# EAGLE board PCBok v24 (EAGLE 9.7.0)
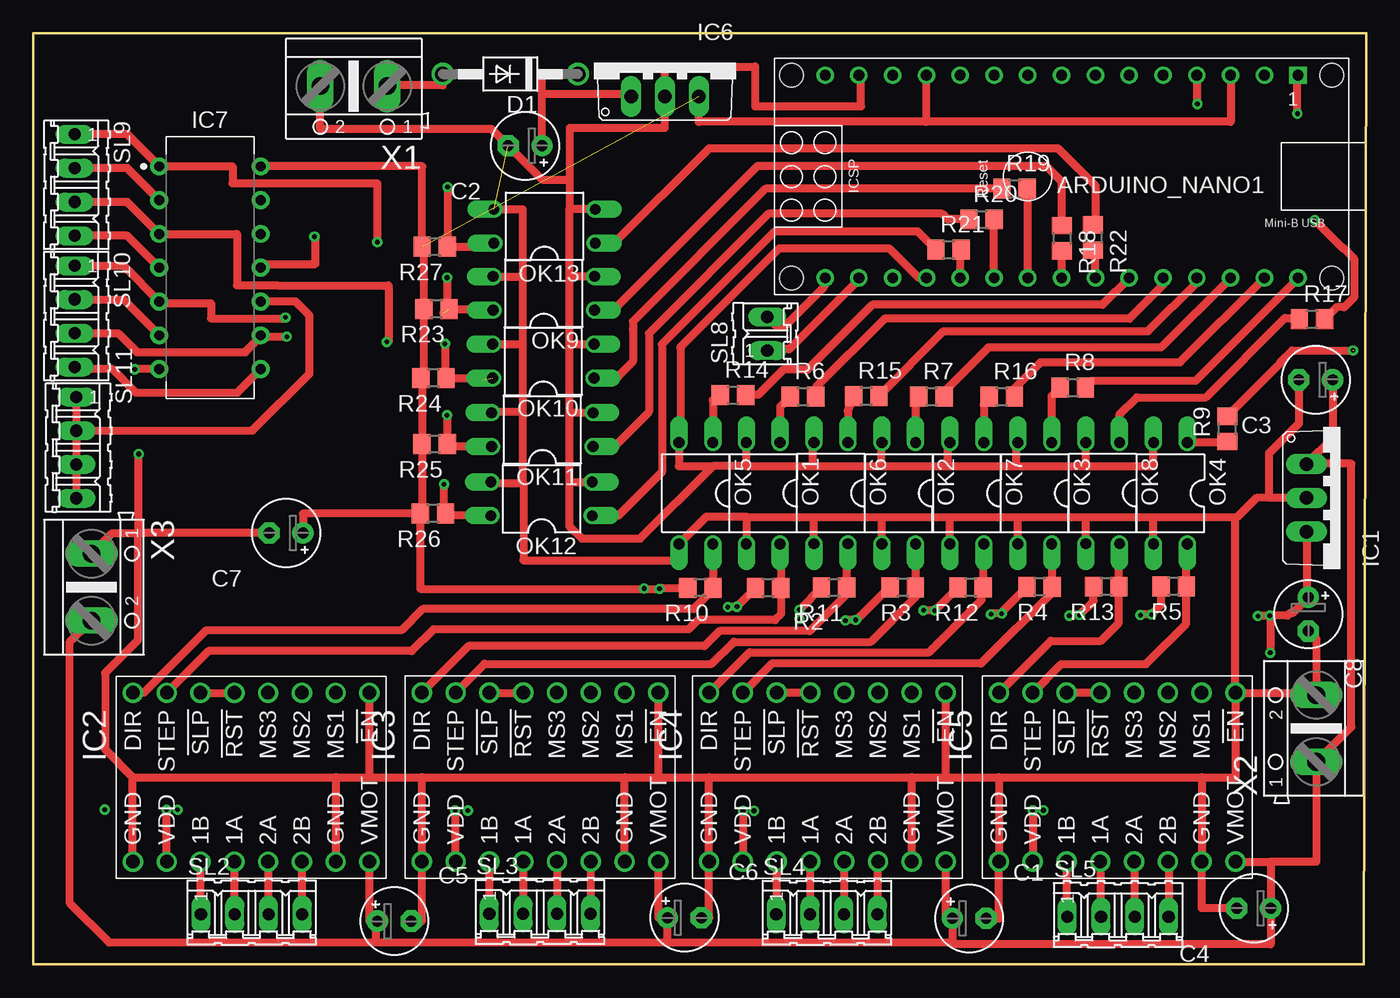
[diagram p0: board, top side]
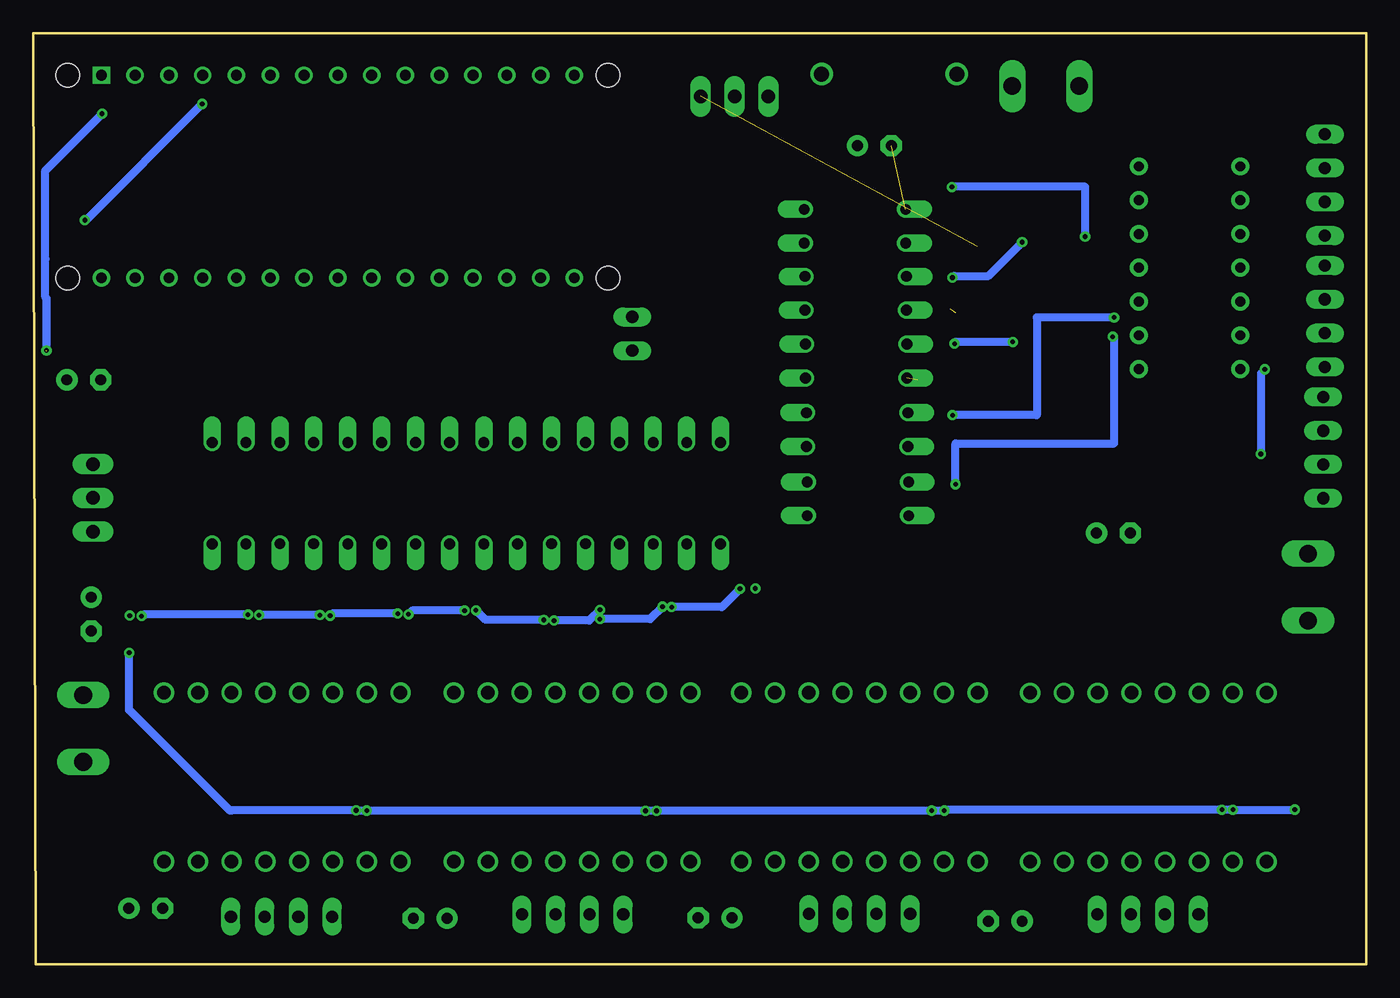
[diagram p1: board, bottom side, seen from below]

Size 100.2 x 70 mm. Coordinates in mm from the lower left corner, seen from the top.
Outline: 0,0 100,0 100.2,70 0,70 0,0
Copper layers (1*16): Top / Bottom
Stack-up Default Layer Stack: Top User Defined 0.035mm / Dielectric-1 User Defined 1.5mm / Bottom User Defined 0.035mm
Design rules "default": minimum track width 6mil, minimum drill 0.35mm, track to track 6mil, track to pad 6mil, pad to pad 6mil, via to via 6mil, smd to smd 6mil, copper to edge 40mil, drill to drill 6mil, minimum pad ring 10mil, minimum via ring 8mil, stop-mask expansion 4mil, vias tented up to drill 0mil, thermal gap 10mil

## Footprints (pad centres in the part's own frame; a part is rotated, then mirrored left to right if it is on the bottom)
ARDUINO_NANO = drill 0.8 square: 1 -20.32,-7.62 | drill 0.8: 2 -17.78,-7.62; 3 -15.24,-7.62; 4 -12.7,-7.62; 5 -10.16,-7.62; 6 -7.62,-7.62; 7 -5.08,-7.62; 8 -2.54,-7.62; 9 0,-7.62; 10 2.54,-7.62; 11 5.08,-7.62; 12 7.62,-7.62; 13 10.16,-7.62; 14 12.7,-7.62; 15 15.24,-7.62; 16 15.24,7.62; 17 12.7,7.62; 18 10.16,7.62; 19 7.62,7.62; 20 5.08,7.62; 21 2.54,7.62; 22 0,7.62; 23 -2.54,7.62; 24 -5.08,7.62; 25 -7.62,7.62; 26 -10.16,7.62; 27 -12.7,7.62; 28 -15.24,7.62; 29 -17.78,7.62; 30 -20.32,7.62 | hole 1.778: -22.86,-7.62; -22.86,7.62; 17.78,7.62; 17.78,-7.62
E2,5-5 = drill 0.813 pad 1.6: + -1.27,0 | drill 0.813 pad 1.6 octagon: - 1.27,0
DO41-10 = drill 1.118: A 5.08,0; C -5.08,0
TO220V = drill 1.016 long: 1 -2.54,-2.54; 2 0,-2.54; 3 2.54,-2.54
A4988 = drill 1.016: 1 -6.35,8.89; 2 -6.35,6.35; 3 -6.35,3.81; 4 -6.35,1.27; 5 -6.35,-1.27; 6 -6.35,-3.81; 7 -6.35,-6.35; 8 -6.35,-8.89; 9 6.35,-8.89; 10 6.35,-6.35; 11 6.35,-3.81; 12 6.35,-1.27; 13 6.35,1.27; 14 6.35,3.81; 15 6.35,6.35; 16 6.35,8.89
DIP762W53P254L1969H508Q14B = drill 0.743 pad 1.343: 1 -3.81,7.62; 2 -3.81,5.08; 3 -3.81,2.54; 4 -3.81,0; 5 -3.81,-2.54; 6 -3.81,-5.08; 7 -3.81,-7.62; 8 3.81,-7.62; 9 3.81,-5.08; 10 3.81,-2.54; 11 3.81,0; 12 3.81,2.54; 13 3.81,5.08; 14 3.81,7.62
DIL04 = drill 0.813 offset: 1 -1.27,-3.81; 2 1.27,-3.81; 3 1.27,3.81; 4 -1.27,3.81
R0805 = smd 1.3 x 1.5: 1 -0.95,0; 2 0.95,0
04P = drill 0.914 long: 1 -3.81,0; 2 -1.27,0; 3 1.27,0; 4 3.81,0
02P = drill 0.914 long: 1 -1.27,0; 2 1.27,0
AK500/2 = drill 1.321 long: 1 -2.515,0; 2 2.515,0

## Placement (x,y rotation side)
ARDUINO_NANO1  [ARDUINO_NANO]  74.77,59.23 180 top
C1  100u  [E2,5-5]  70.36,3.45 0 top
C2  100u  [E2,5-5]  36.97,61.54 180 top
C3  100u  [E2,5-5]  96.41,43.95 180 top
C4  100u  [E2,5-5]  91.75,4.22 180 top
C5  100u  [E2,5-5]  27.14,3.24 0 top
C6  100u  [E2,5-5]  48.95,3.5 0 top
C7  100u  [E2,5-5]  19.01,32.43 180 top
C8  100u  [E2,5-5]  95.85,26.33 270 top
D1  1N4004  [DO41-10]  35.86,66.93 180 top
IC1  7805TV  [TO220V]  98.26,35.06 270 top
IC2  2128-A4988  [A4988]  16.38,14.06 270 top
IC3  2128-A4988  [A4988]  38.1,14.07 270 top
IC4  2128-A4988  [A4988]  59.69,14.07 270 top
IC5  2128-A4988  [A4988]  81.48,14.07 270 top
IC6  7805TV  [TO220V]  47.49,67.8 0 top
IC7  74HC04_PDIP  [DIP762W53P254L1969H508Q14B]  13.29,52.37 0 top
OK1  PC817  [DIL04]  54.87,35.42 180 top
OK2  PC817  [DIL04]  65.06,35.42 180 top
OK3  PC817  [DIL04]  75.29,35.41 180 top
OK4  PC817  [DIL04]  85.48,35.41 180 top
OK5  PC817  [DIL04]  49.81,35.41 180 top
OK6  PC817  [DIL04]  59.96,35.43 180 top
OK7  PC817  [DIL04]  70.19,35.41 180 top
OK8  PC817  [DIL04]  80.39,35.43 180 top
OK9  PC817  [DIL04]  38.38,50.45 90 top
OK10  PC817  [DIL04]  38.33,45.35 90 top
OK11  PC817  [DIL04]  38.27,40.2 90 top
OK12  PC817  [DIL04]  38.21,35 90 top
OK13  PC817  [DIL04]  38.43,55.49 90 top
R2  100  [R0805]  55.25,28.3 180 top
R3  100  [R0805]  65.37,28.34 180 top
R4  100  [R0805]  75.65,28.38 180 top
R5  100  [R0805]  85.73,28.41 180 top
R6  100  [R0805]  57.86,42.69 0 top
R7  100  [R0805]  67.52,42.69 0 top
R8  100  [R0805]  78.14,43.37 0 top
R9  100  [R0805]  89.76,40.26 90 top
R10  100  [R0805]  50.15,28.31 180 top
R11  100  [R0805]  60.21,28.32 180 top
R12  100  [R0805]  70.46,28.34 180 top
R13  100  [R0805]  80.65,28.39 180 top
R14  100  [R0805]  52.6,42.8 0 top
R15  100  [R0805]  62.62,42.73 0 top
R16  100  [R0805]  72.81,42.68 0 top
R17  100  [R0805]  96.13,48.5 0 top
R18  100  [R0805]  77.34,54.59 270 top
R19  100  [R0805]  73.76,58.31 0 top
R20  100  [R0805]  71.29,56.01 0 top
R21  100  [R0805]  68.81,53.73 0 top
R22  100  [R0805]  79.67,54.64 270 top
R23  100  [R0805]  30.31,49.28 180 top
R24  100  [R0805]  30.09,44.06 180 top
R25  100  [R0805]  30.17,39.1 180 top
R26  100  [R0805]  30.05,33.88 180 top
R27  100  [R0805]  30.18,53.94 180 top
SL2  [04P]  16.41,3.76 0 top
SL3  [04P]  38.09,3.8 0 top
SL4  [04P]  59.66,3.75 0 top
SL5  [04P]  81.54,3.58 0 top
SL8  [02P]  55.17,47.41 90 top
SL9  [04P]  3.11,58.59 270 top
SL10  [04P]  3.11,48.72 270 top
SL11  [04P]  3.24,38.85 270 top
X1  Power  [AK500/2]  24.1,66.02 180 top
X2  Motor_power  [AK500/2]  96.45,17.73 90 top
X3  [AK500/2]  4.37,28.36 270 top

## Library data of the parts
ARDUINO_NANO1 = ArduinoNanoV30
C1-C8 = rcl; SPICEPREFIX: C
D1 = diode
IC1 IC6 = linear
IC2-IC5 = pololu-stepper-driver
IC7 = IC_Logic; CATEGORY: IC_Logic; DESCRIPTION: Hex Inverters; MANUFACTURER: Generic; MPN: Generic; SUB-CATEGORY: Inverter; TYPE: Hex
OK1-OK13 = optocoupler; MPN: PC817X4J000F; OC_FARNELL: 9707727; OC_NEWARK: 97K7059
R2-R27 = rcl; SPICEPREFIX: R
SL2-SL5 SL8-SL11 = con-amp-quick; OC_FARNELL: unknown; OC_NEWARK: unknown
X1-X3 = con-ptr500; OC_FARNELL: unknown; OC_NEWARK: unknown

## Nets
+5V: ARDUINO_NANO1.3 ARDUINO_NANO1.12 C7.+ C8.+ IC1.3 IC2.10 IC3.10 IC4.10 IC5.10 IC6.3 IC7.14 R2.2 R3.2 R4.2 R5.2 R10.2 R11.2 R12.2 R13.2 R23.2 R24.2 R25.2 R26.2 R27.2
+12V: C1.+ C3.+ C4.+ C5.+ C6.+ IC1.1 IC2.16 IC3.16 IC4.16 IC5.16 X2.1 X3.2
DIR1: ARDUINO_NANO1.20 R21.2
DIR2: ARDUINO_NANO1.21 R20.2
DIR3: ARDUINO_NANO1.22 R19.2
DIR4: ARDUINO_NANO1.23 R18.2
DIR_S1: IC2.8 OK5.4 R10.1
DIR_S2: IC3.8 OK6.4 R11.1
DIR_S3: IC4.8 OK7.4 R12.1
DIR_S4: IC5.8 OK8.4 R13.1
DS1: ARDUINO_NANO1.25 R14.2
DS2: ARDUINO_NANO1.27 R15.2
DS3: ARDUINO_NANO1.29 R16.2
DS4: ARDUINO_NANO1.4 R17.2
GND: ARDUINO_NANO1.14 ARDUINO_NANO1.19 C1.- C2.- C3.- C4.- C5.- C6.- C7.- C8.- IC1.2 IC2.1 IC2.9 IC2.15 IC3.1 IC3.9 IC3.15 IC4.1 IC4.9 IC4.15 IC5.1 IC5.9 IC5.15 IC6.2 IC7.7 OK1.2 OK1.3 OK2.2 OK2.3 OK3.2 OK3.3 OK4.2 OK4.3 OK5.2 OK5.3 OK6.2 OK6.3 OK7.2 OK7.3 OK8.2 OK8.3 OK9.2 OK9.3 OK10.2 OK10.3 OK11.2 OK11.3 OK12.2 OK12.3 OK13.2 OK13.3 X1.2 X2.2 X3.1
N$1: IC2.5 IC2.6
N$2: IC3.5 IC3.6
N$3: IC4.5 IC4.6
N$4: IC5.5 IC5.6
N$5: IC7.2 SL9.2
N$6: IC7.4 SL9.4
N$7: IC7.6 SL10.2
N$8: OK1.1 R6.1
N$9: D1.A X1.1
N$10: ARDUINO_NANO1.16 SL8.2
N$11: ARDUINO_NANO1.17 SL8.1
N$12: IC7.8 SL10.4
N$13: IC7.11 OK13.4 R27.1
N$14: ARDUINO_NANO1.5
N$15: IC7.10 SL11.1 SL11.2 SL11.3 SL11.4
N$16: ARDUINO_NANO1.6
N$17: ARDUINO_NANO1.7
N$18: ARDUINO_NANO1.8
N$19: ARDUINO_NANO1.9
N$20: ARDUINO_NANO1.10
N$21: ARDUINO_NANO1.11
N$24: C2.+ D1.C IC6.1
N$29: IC2.11 SL2.1
N$30: IC2.12 SL2.2
N$31: IC2.13 SL2.3
N$32: IC2.14 SL2.4
N$33: IC3.11 SL3.1
N$34: IC3.12 SL3.2
N$35: IC3.13 SL3.3
N$40: IC3.14 SL3.4
N$41: IC5.11 SL5.1
N$42: OK5.1 R14.1
N$43: OK2.1 R7.1
N$44: OK6.1 R15.1
N$45: OK3.1 R8.1
N$46: OK7.1 R16.1
N$47: OK4.1 R9.1
N$48: OK8.1 R17.1
N$49: IC5.12 SL5.2
N$50: IC5.13 SL5.3
N$51: IC5.14 SL5.4
N$52: IC4.11 SL4.1
N$53: IC4.12 SL4.2
N$54: IC4.13 SL4.3
N$55: IC4.14 SL4.4
N$101: IC7.5 OK11.4 R25.1 SL10.1
N$102: IC7.1 OK9.4 R23.1 SL9.1
N$104: OK10.1 R19.1
N$105: OK13.1 R22.1
N$115: OK11.1 R20.1
N$118: IC7.9 OK12.4 R26.1 SL10.3
N$119: OK12.1 R21.1
N$123: OK9.1 R18.1
N$132: IC7.3 OK10.4 R24.1 SL9.3
PWM_DC: ARDUINO_NANO1.24 R22.2
SS1: ARDUINO_NANO1.26 R6.2
SS2: ARDUINO_NANO1.28 R7.2
SS3: ARDUINO_NANO1.30 R8.2
SS4: ARDUINO_NANO1.1 R9.2
STP_S1: IC2.7 OK1.4 R2.1
STP_S2: IC3.7 OK2.4 R3.1
STP_S3: IC4.7 OK3.4 R4.1
STP_S4: IC5.7 OK4.4 R5.1
VIN: ARDUINO_NANO1.15

## Tracks (layer width: path | path; a pad name or v marks a point on that pad's centre or on a via)
+5V  (via drill 0.35)  (1 unrouted)
  Top 0.61: IC2.10 10.03,11.62 v10.02,11.62 | v31.73,11.56 31.73,7.72 IC3.10 | v53.35,11.54 IC4.10 | v75.13,11.56 IC5.10 | IC5.10 | R3.2 64.32,28.34 61.85,25.87 v61.83,25.89 61.1,25.89 v61.05,25.84 | R11.2 v57.6,26.66 57.61,26.64 v57.61,25.96 | R2.2 52.9,26.9 v52.9,26.89 52.24,26.89 v52.21,26.86 | R4.2 72.8,26.48 v72.8,26.36 72.05,26.36 v72,26.32 | R13.2 79.7,27.29 v78.66,26.25 77.92,26.25 v77.88,26.21 | R5.2 84.78,27.01 v84.06,26.29 83.26,26.29 v83.23,26.26 | R12.2 67.78,26.61 v67.78,26.59 66.94,26.59 v66.92,26.61 v66.93,26.62 | R10.2 47.15,28.31 v47.07,28.23 45.96,28.23 | 45.96,28.23 v45.92,28.26 | 95.06,32.52 IC1.3 95.72,27.72 C8.+ 94.67,26.42 94.49,26.42 94.29,26.22 v92.95,26.22 | v92.06,26.18 92.91,26.18 v92.95,26.22 | ARDUINO_NANO1.3 90.01,63.35 67.14,63.35 | 67.14,63.35 ARDUINO_NANO1.12 | 67.14,63.35 50.03,63.35 IC6.3 | IC7.14 29.23,59.99 R27.2 29.37,53.94 R23.2 29.37,44.06 R24.2 29.22,44.06 R25.2 29.22,33.88 R26.2 | R26.2 29.1,28.23 45.96,28.23 | R26.2 20.28,33.88 C7.+ | v93,23.42 93.02,23.44 93.02,26.15 v92.95,26.22
  Bottom 0.61: v5.37,11.63 v5.39,11.62 v10.02,11.62 v10.85,11.62 31.66,11.62 v31.73,11.56 v32.67,11.56 53.36,11.56 53.36,11.54 v53.35,11.54 v54.19,11.54 75.17,11.54 75.17,11.56 v75.13,11.56 75.93,11.56 v75.93,11.58 85.32,11.58 85.33,11.56 85.44,11.56 93,19.12 v93,23.42 | v47.07,28.23 48.44,26.86 v52.21,26.86 | v52.9,26.89 53.82,25.96 v57.61,25.96 | v57.6,26.66 58.41,25.84 v61.05,25.84 | v61.83,25.89 66.2,25.89 v66.93,26.62 | v67.78,26.59 71.73,26.59 v72,26.32 | v72.8,26.36 77.73,26.36 v77.88,26.21 | v78.66,26.25 v83.22,26.25 v83.23,26.26 | v84.06,26.29 91.95,26.29 v92.06,26.18
+12V
  Top 0.61: IC2.16 25.27,3.24 C5.+ 25.78,3.24 25.78,1.65 | IC3.16 46.99,3.5 C6.+ 47.68,1.65 | IC4.16 68.58,3.45 C1.+ 69.09,1.65 | IC5.16 93.02,7.72 | 93.02,7.72 96.45,7.72 X2.1 99.1,17.87 99.1,37.63 95.75,37.63 | 25.78,1.65 47.68,1.65 | 47.68,1.65 69.09,1.65 | 95.75,37.63 IC1.1 | C3.+ 97.68,39.56 95.75,37.63 | 25.78,1.65 5.7,1.65 2.72,4.63 2.72,24.19 X3.2 | 93.02,7.72 C4.+ 93.02,1.49 69.09,1.49 69.09,1.65
DIR1
  Top 0.61: ARDUINO_NANO1.20 69.69,53.66 R21.2
DIR2
  Top 0.61: ARDUINO_NANO1.21 72.23,56 R20.2
DIR3
  Top 0.61: ARDUINO_NANO1.22 74.77,58.26 R19.2
DIR4
  Top 0.61: ARDUINO_NANO1.23 77.31,53.61 R18.2
DIR_S1
  Top 0.61: OK5.4 51.08,28.31 R10.1 51.1,28.17 49.64,26.71 29.27,26.71 27.67,25.11 13.02,25.11 8.31,20.41 IC2.8
DIR_S2
  Top 0.61: IC3.8 32.71,23.92 50.45,23.92 51.58,25.06 58.38,25.06 61.16,27.84 R11.1 61.16,31.62 OK6.4
DIR_S3
  Top 0.61: IC4.8 53.84,23.46 67.34,23.46 71.28,27.4 71.28,28.21 R12.1 71.41,31.6 OK7.4
DIR_S4
  Top 0.61: IC5.8 76.49,24.31 80.26,24.31 81.6,25.66 R13.1 81.6,31.62 OK8.4
DS1
  Top 0.61: ARDUINO_NANO1.25 80.37,49.59 63.1,49.59 58.21,44.71 56.39,44.71 54.48,42.8 R14.2
DS2
  Top 0.61: R15.2 68.44,47.6 83.8,47.6 87.47,51.27 ARDUINO_NANO1.27
DS3
  Top 0.61: R16.2 73.76,43.29 75.73,45.27 86.21,45.27 ARDUINO_NANO1.29
DS4  (via drill 0.35)
  Top 0.61: R17.2 97.97,49.4 98.54,49.4 99.3,50.15 99.3,53.05 98.54,53.82 98.47,53.82 v96.33,55.95 | ARDUINO_NANO1.4 87.47,64.69 87.49,64.67 v87.51,64.69
  Bottom 0.61: v87.51,64.69 96.24,55.95 v96.33,55.95
GND  (via drill 0.35)  (1 unrouted)
  Top 0.61: OK4.3 84.22,33.61 | 84.22,33.61 79.12,33.61 | 79.12,33.61 74.02,33.61 | 74.02,33.61 68.92,33.61 | 68.92,33.61 63.79,33.61 | 63.79,33.61 58.69,33.61 | 58.69,33.61 53.6,33.61 | 53.6,33.61 OK1.3 | 53.6,33.61 53.6,33.64 50.58,33.64 OK5.3 48.54,30.38 36.85,30.38 36.85,36.17 36.79,36.17 | OK6.3 58.69,33.61 | OK2.3 63.79,33.61 | OK7.3 68.92,33.61 | OK3.3 74.02,33.61 | OK8.3 79.12,33.61 | IC2.9 7.49,14.06 | 7.49,14.06 22.73,14.06 | 22.73,14.06 25.27,14.06 | 25.27,14.06 IC2.1 | 22.73,14.06 IC2.15 | 25.27,14.06 29.21,14.06 | 29.21,14.06 44.45,14.06 | 44.45,14.06 46.99,14.06 | 46.99,14.06 50.8,14.06 | 50.8,14.06 66.04,14.06 | 66.04,14.06 68.58,14.06 | 68.58,14.06 72.59,14.06 | 72.59,14.06 87.83,14.06 | 87.83,14.06 IC5.15 87.83,4.22 C4.- | 46.99,14.06 IC3.1 | IC3.15 44.45,14.06 | 29.21,14.06 IC3.9 29.21,3.24 C5.- | 50.8,14.06 IC4.9 50.8,3.5 C6.- | IC4.15 66.04,14.06 | 72.59,14.06 IC5.9 72.59,3.45 C1.- | IC4.1 68.58,14.06 | IC5.1 90.37,14.06 87.83,14.06 | 53.6,37.46 51.08,37.46 | 51.08,37.46 48.54,37.46 OK5.2 48.65,39.33 48.65,46.4 56.07,53.82 64.35,53.82 66.56,51.61 ARDUINO_NANO1.19 | 53.6,37.46 58.63,37.46 | 58.63,37.46 63.77,37.46 | 63.77,37.46 68.77,37.46 | 68.77,37.46 73.91,37.46 | 73.91,37.46 79.12,37.46 | 79.12,37.46 84.22,37.46 OK4.2 | 79.12,37.46 OK8.2 | 73.91,37.46 73.91,39.22 OK3.2 | 68.77,37.46 68.77,39.22 OK7.2 | 63.77,37.46 63.77,39.23 OK2.2 | 58.63,37.46 58.63,39.24 OK6.2 | 53.6,37.46 OK1.2 | IC5.1 90.37,33.47 | 90.37,33.47 90.37,33.61 84.22,33.61 | IC5.1 96.45,20.42 | 96.45,20.42 X2.2 | IC1.2 92.95,35.07 | 92.95,35.07 91.98,35.08 90.37,33.47 | C8.- 96.45,24.45 96.45,20.42 | C3.- 95.14,40.67 92.91,38.45 92.91,35.11 92.95,35.07 | OK13.2 40.33,56.76
  Top 0.61: 40.33,56.76 40.28,56.76 40.28,51.72 | 40.28,51.72 40.28,46.62 | 40.28,46.62 40.28,41.47 | 40.28,41.47 40.28,36.27 | 40.28,36.27 OK12.2 | 40.28,41.47 OK11.2 | 40.28,46.62 OK10.2 | OK9.2 40.28,51.72 | 40.28,36.27 40.28,32.97 41.24,32 45.63,32 51.08,37.46 | 40.33,59 40.33,56.76 | 40.33,59 38.24,59 C2.- 34.44,62.81 21.58,62.81 X1.2 | OK13.3 36.79,56.76 36.79,51.72 | 36.79,51.72 36.79,46.62 | 36.79,46.62 36.79,41.52 | 36.79,41.52 36.79,36.17 | 36.79,36.17 34.4,36.17 OK12.3 | OK11.3 34.46,41.52 36.79,41.52 | OK10.3 36.79,46.62 | OK9.3 36.79,51.72 | IC7.7 7.62,44.75 v7.62,44.74 | C7.- 7.93,32.43 | 7.93,32.43 v7.93,38.36 | IC6.2 47.51,65.23 47.51,64.31 | X3.1 5.93,32.43 7.84,32.43 | 7.84,32.43 7.93,32.43 | 7.84,32.43 7.84,24.34 5.39,21.89 5.39,16.16 7.49,14.06 | IC6.2 47.49,67.49 54.27,67.49 54.27,64.5 62.22,64.5 62.22,66.85 ARDUINO_NANO1.14 | 40.33,59 40.34,59 40.34,62.9 47.49,62.9 IC6.2
  Bottom 0.61: v7.62,44.74 7.93,44.43 v7.93,38.36
N$1
  Top 0.61: IC2.6 IC2.5
N$2
  Top 0.61: IC3.6 IC3.5
N$3
  Top 0.61: IC4.5 IC4.6
N$4
  Top 0.61: IC5.5 IC5.6
N$5
  Top 0.61: IC7.2 7.07,59.86 SL9.2
N$6
  Top 0.61: IC7.4 7.07,54.78 SL9.4
N$7
  Top 0.61: SL10.2 6.78,49.99 IC7.6
N$8
  Top 0.61: OK1.1 56.14,41.91 R6.1
N$9
  Top 0.61: D1.A 30.78,66.08 26.61,66.08 X1.1
N$10
  Top 0.61: SL8.2 55.97,47.89 56.39,47.89 59.46,50.96 59.46,51.54 ARDUINO_NANO1.16
N$11
  Top 0.61: ARDUINO_NANO1.17 62.07,51.46 56.84,46.24 55.28,46.24 SL8.1
N$12
  Top 0.61: SL10.4 3.24,44.78 5.92,44.78 7.71,42.99 15.33,42.99 IC7.8
N$13  (via drill 0.35)
  Top 0.61: IC7.11 17.1,52.64 21.23,52.64 21.23,54.71 v21.13,54.71 | v31.15,58.44 31.15,53.94 R27.1 34.63,53.94 OK13.4
  Bottom 0.61: v21.13,54.71 21.13,58.46 31.13,58.46 v31.15,58.44
N$15
  Top 0.61: SL11.1 SL11.2 | SL11.2 SL11.3 SL11.4 | SL11.2 16.47,40.12 20.77,44.41 20.77,48.78 19.71,49.84 IC7.10
N$24
  Top 0.61: D1.C 38.24,66.93 38.24,65.46 | 38.24,65.46 44.95,65.46 IC6.1 | C2.+ 38.24,65.46
N$29
  Top 0.61: SL2.1 12.57,3.76 IC2.11
N$30
  Top 0.61: SL2.2 15.15,7.71 IC2.12
N$31
  Top 0.61: 17.72,3.8 SL2.3 17.69,7.71 IC2.13
N$32
  Top 0.61: SL2.4 20.23,7.71 IC2.14
N$33
  Top 0.61: IC3.11 SL3.1
N$34
  Top 0.61: IC3.12 SL3.2
N$35
  Top 0.61: IC3.13 SL3.3
N$40
  Top 0.61: IC3.14 SL3.4
N$41
  Top 0.61: SL5.1 77.67,3.58 IC5.11
N$42
  Top 0.61: R14.1 51.08,42.43 OK5.1
N$43
  Top 0.61: R7.1 66.33,42.29 OK2.1
N$44
  Top 0.61: OK6.1 61.23,41.61 R15.1
N$45
  Top 0.61: OK3.1 76.56,42.73 R8.1
N$46
  Top 0.61: R16.1 71.86,42.52 71.46,42.12 OK7.1
N$47
  Top 0.61: R9.1 89.76,39.22 OK4.1
N$48
  Top 0.61: OK8.1 81.66,41.34 82.95,42.63 88.13,42.63 94.09,48.59 95.09,48.59 R17.1
N$49
  Top 0.61: SL5.2 80.21,3.58 IC5.12
N$50
  Top 0.61: SL5.3 82.81,7.72 IC5.13
N$51
  Top 0.61: SL5.4 85.35,7.72 IC5.14
N$52
  Top 0.61: IC4.11 55.85,7.69 SL4.1
N$53
  Top 0.61: IC4.12 58.39,7.69 SL4.2
N$54
  Top 0.61: IC4.13 60.93,7.69 SL4.3
N$55
  Top 0.61: IC4.14 63.47,7.69 SL4.4
N$101  (via drill 0.35)
  Top 0.61: OK11.4 31.12,38.93 R25.1 31.1,39.1 v31.1,41.28 | SL10.1 6.78,52.53 IC7.5 9.48,49.7 13.36,49.7 13.36,48.56 18.96,48.56 v18.96,48.64
  Bottom 0.61: v18.96,48.64 24.78,48.64 24.78,41.28 v31.1,41.28
N$102  (via drill 0.35)  (1 unrouted)
  Top 0.61: v25.87,54.3 25.87,58.71 14.97,58.71 14.97,59.99 IC7.1 7.07,62.4 SL9.1 | v31.11,51.63 31.11,48.96 30.83,48.96 | R23.1 34.57,49.28 OK9.4
  Bottom 0.61: v31.11,51.63 30.99,51.75 28.42,51.75 v25.87,54.3
N$104
  Top 0.61: R19.1 55.04,58.31 45.07,48.34 45.07,47.69 45.07,45.32 43.83,44.08 OK10.1
N$105
  Top 0.61: R22.1 79.87,55.79 79.87,58.52 77.05,61.33 50.78,61.33 43.67,54.22 OK13.1
N$115
  Top 0.61: 43.04,38.86 42.97,38.93 OK11.1 43.68,38.93 46.28,41.52 46.28,47.43 55.27,56.42 68.34,56.42 68.76,56.01 R20.1
N$118  (via drill 0.35)
  Top 0.61: OK12.4 31,33.73 R26.1 30.87,33.88 v30.87,36.09 | 17.1,47.18 v19.06,47.18 | 17.1,47.18 IC7.9 | SL10.3 6.38,47.45 7.8,46.02 15.94,46.02 17.1,47.18
  Bottom 0.61: v30.87,36.09 30.87,39.17 18.95,39.17 18.95,47.18 v19.06,47.18
N$119
  Top 0.61: OK12.1 43.99,33.73 47.26,37 47.26,46.63 55.72,55.1 66.5,55.1 R21.1
N$123
  Top 0.61: R18.1 77.34,58.85 76.18,60.01 54.44,60.01 43.61,49.18 OK9.1
N$132  (via drill 0.35)  (1 unrouted)
  Top 0.61: 33.73,43.94 33.73,44.06 R24.1 30.95,44.06 v30.95,46.66 | SL9.3 7.07,57.32 IC7.3 15.33,54.91 15.33,51.06 18.33,51.06 18.33,51.03 26.71,51.03 26.71,46.79 v26.58,46.79
  Bottom 0.61: v26.58,46.79 30.88,46.79 30.88,46.66 v30.95,46.66
PWM_DC
  Top 0.61: ARDUINO_NANO1.24 79.85,53.52 R22.2
SS1
  Top 0.61: ARDUINO_NANO1.26 84.93,51.07 82.4,48.55 64.01,48.55 58.81,43.35 R6.2
SS2
  Top 0.61: ARDUINO_NANO1.28 84.78,46.38 71.81,46.38 68.47,43.04 R7.2
SS3
  Top 0.61: R8.2 79.59,43.87 87.34,43.87 ARDUINO_NANO1.30
SS4  (via drill 0.35)  (1 unrouted)
  Top 0.61: 99.28,46.16 94.63,46.16 93.78,45.31 93.78,45.23 R9.2 | v99.21,46.16 | v95.03,63.95 95.03,66.79 ARDUINO_NANO1.1
  Bottom 0.61: v99.21,46.16 99.21,50.06 99.3,50.15 99.3,53.05 99.3,59.68 v95.03,63.95
STP_S1
  Top 0.61: OK1.4 56.2,31.61 R2.1 56.2,26.31 55.77,25.89 49.98,25.89 49.27,25.18 30.08,25.18 28.46,23.55 13.18,23.55 IC2.7
STP_S2
  Top 0.61: 31.87,20.42 IC3.7 33.92,22.59 51,22.59 52.67,24.26 62.97,24.26 66.32,27.61 R3.1 66.32,31.6 OK2.4
STP_S3
  Top 0.61: IC4.7 55.52,22.61 71.25,22.61 76.6,27.95 R4.1 76.6,31.6 OK3.4
STP_S4
  Top 0.61: IC5.7 77.29,22.57 83.65,22.57 86.68,25.6 R5.1 86.68,31.6 OK4.4